# EAGLE board Arduino PMC (EAGLE 6.2)
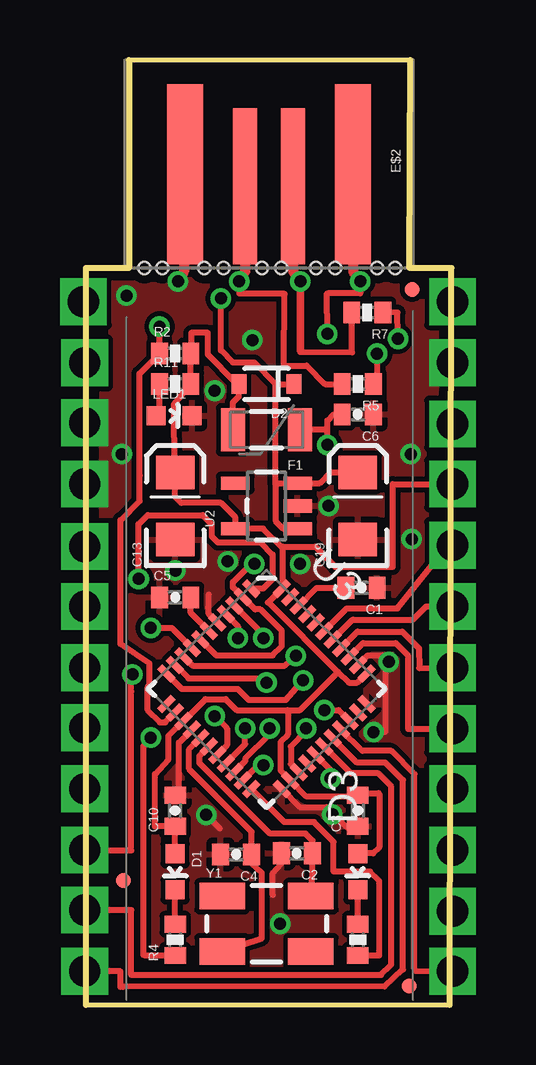
[diagram p0: board, top side]
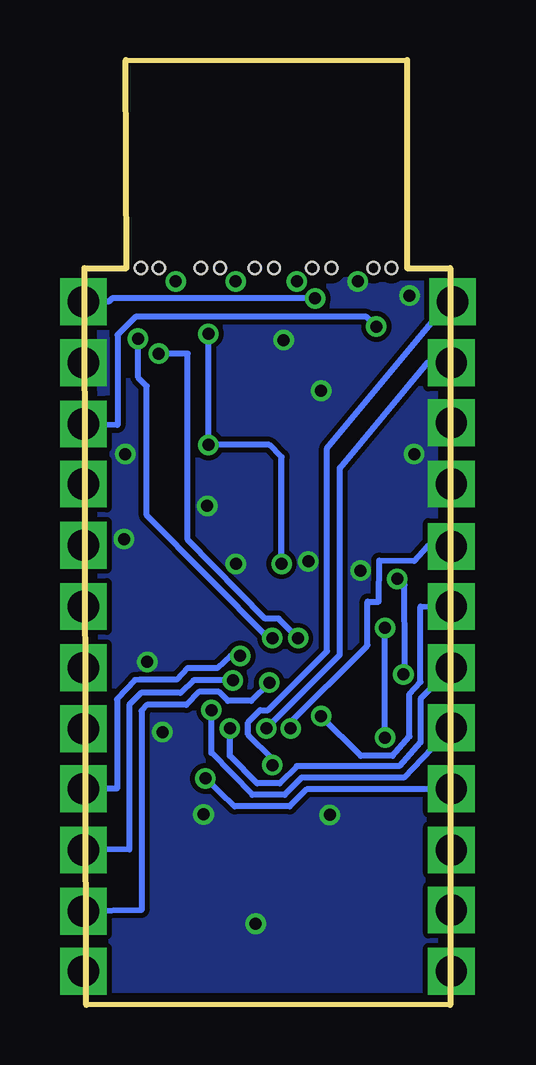
[diagram p1: board, bottom side, seen from below]

Size 15.25 x 39.37 mm. Coordinates in mm from the lower left corner, seen from the top.
Outline: 1.8,39.37 1.8,30.7 0,30.7 0,0 15.18,0 15.25,30.7 13.5,30.7 13.53,39.37 1.8,39.37
Copper layers (1*16): Top 0.0356mm / dielectric 1.5011mm / Bottom 0.0356mm
Design rules: minimum track width 6mil, minimum drill 13mil, track to track 6mil, track to pad 6mil, pad to pad 6mil, via to via 6mil, smd to smd 6mil, copper to edge 15mil, drill to drill 6mil, minimum pad ring 7mil, minimum via ring 7mil, stop-mask expansion 4mil, vias tented up to drill 0mil, thermal gap 10mil
Net classes: 0 default: width 0.203 mm
Holes 0.5 mm at 2.45,30.7 3.2,30.7 4.95,30.7 5.75,30.7 7.35,30.7 8.15,30.7 9.6,30.7 10.4,30.7 12.15,30.7 12.9,30.7

## Footprints (pad centres in the part's own frame; a part is rotated, then mirrored left to right if it is on the bottom)
0402-CAP = smd 0.7 x 0.9: 1 -0.65,0; 2 0.65,0
EIA3216 = smd 1.4 x 1.6: A 1.4,0; C -1.4,0
LED-0603 = smd 0.8 x 0.8: A 0,-0.75; C 0,0.75
SOD-323 = smd 0.63 x 0.83: 1 -1.15,0; 2 1.15,0
USB-A-PCB = smd 7.5 x 1.5: 5V -0.2,-3.5; GND -0.2,3.5 | smd 6.5 x 1: USB_M 0.3,-1; USB_P 0.3,1
PTC-1206 = smd 1 x 1.8: 1 -1.4,0; 2 1.4,0
MICRO-FIDUCIAL = smd 0.635 x 0.635: 1 0,0
0402-RES = smd 0.7 x 0.9: 1 -0.65,0; 2 0.65,0
SOT23-5 = smd 0.55 x 1.2: 1 -0.95,-1.3; 2 0,-1.3; 3 0.95,-1.3; 4 0.95,1.3; 5 -0.95,1.3
QFN-44-NOPAD = smd 0.8 x 0.3: 1 -3.4,2.5; 2 -3.4,2; 3 -3.4,1.5; 4 -3.4,1; 5 -3.4,0.5; 6 -3.4,0; 7 -3.4,-0.5; 8 -3.4,-1; 9 -3.4,-1.5; 10 -3.4,-2; 11 -3.4,-2.5; 23 3.4,-2.5; 24 3.4,-2; 25 3.4,-1.5; 26 3.4,-1; 27 3.4,-0.5; 28 3.4,0; 29 3.4,0.5; 30 3.4,1; 31 3.4,1.5; 32 3.4,2; 33 3.4,2.5 | smd 0.3 x 0.8: 12 -2.5,-3.4; 13 -2,-3.4; 14 -1.5,-3.4; 15 -1,-3.4; 16 -0.5,-3.4; 17 0,-3.4; 18 0.5,-3.4; 19 1,-3.4; 20 1.5,-3.4; 21 2,-3.4; 22 2.5,-3.4; 34 2.5,3.4; 35 2,3.4; 36 1.5,3.4; 37 1,3.4; 38 0.5,3.4; 39 0,3.4; 40 -0.5,3.4; 41 -1,3.4; 42 -1.5,3.4; 43 -2,3.4; 44 -2.5,3.4
CRYSTAL-SMD-5X3 = smd 1.9 x 1.1: 1 -1.85,-1.15; 2 1.85,-1.15; 3 1.85,1.15; 4 -1.85,1.15

## Placement (x,y rotation side)
C1  0.1uF  [0402-CAP]  11.5,17.38 180 top
C2  22pF  [0402-CAP]  8.81,6.32 180 top
C3  0.1uF  [0402-CAP]  11.35,8.09 90 top
C4  22pF  [0402-CAP]  6.27,6.27 180 top
C5  1uF  [0402-CAP]  3.73,16.98 0 top
C6  1uF  [0402-CAP]  11.35,24.6 180 top
C10  1uF  [0402-CAP]  3.73,8.09 90 top
C13  10uF  [EIA3216]  3.73,20.79 90 top
C19  10uF  [EIA3216]  11.35,20.79 90 top
D1  Yellow  [LED-0603]  3.73,5.55 180 top
D2  [SOD-323]  7.54,25.87 180 top
D3  Green  [LED-0603]  11.35,5.55 180 top
E$2  [USB-A-PCB]  7.65,34.4 270 top
F1  500mA  [PTC-1206]  7.54,23.96 180 top
JP1  FIDUCIALUFIDUCIAL  [MICRO-FIDUCIAL]  13.48,0.79 0 top
JP2  FIDUCIALUFIDUCIAL  [MICRO-FIDUCIAL]  13.62,29.81 0 top
JP3  FIDUCIALUFIDUCIAL  [MICRO-FIDUCIAL]  1.58,5.19 0 top
LED1  Red  [LED-0603]  3.68,24.55 270 top
R2  10K  [0402-RES]  3.73,27.14 0 top
R4  330  [0402-RES]  3.73,2.71 90 top
R5  22  [0402-RES]  11.35,25.87 180 top
R6  330  [0402-RES]  11.35,2.71 90 top
R7  22  [0402-RES]  11.74,28.85 180 top
R11  1K  [0402-RES]  3.73,25.87 0 top
U2  MIC5219  [SOT23-5]  7.54,20.79 90 top
U3  ATMEGA32U4  [QFN-44-NOPAD]  7.54,13.17 315 top
Y1  16MHz  [CRYSTAL-SMD-5X3]  7.54,3.38 0 top

## Library data of the parts
C1-C6 C10 C13 C19 D1-D3 F1 JP1-JP3 LED1 R2 R4-R7 R11 U2 U3 Y1 = SparkFun
E$2 = SparkFun-Connectors

## Nets
A0: U3.36
A1: U3.37
A2: U3.38
A3: U3.39
A4: U3.40
A5: U3.41
AREF: C1.2 U3.42
D2: U3.19
D3: U3.18
D4: U3.25
D5: U3.31
D6: U3.27
D7: U3.1
D8: U3.28
D9: U3.29
D10: U3.30
D11: U3.12
D12: U3.26
D13: U3.32
D17: R4.1 U3.8
D+: R5.1 U3.4
D-: R7.1 U3.3
GND [vcc]: C1.1 C2.2 C3.1 C4.2 C5.1 C6.1 C10.2 C13.C C19.C LED1.C U2.2 U3.5 U3.15 U3.23 U3.33 U3.35 U3.43
MISO: U3.11
MOSI: U3.10
N$1: C4.1 U3.16 Y1.1
N$2: C2.1 U3.17 Y1.3
N$4: C5.2 U3.6
N$5: D1.C R4.2
N$6: R7.2
N$7: D3.C R6.2
N$8: R5.2
N$38: LED1.A R11.1
RAW [vcc]: C19.A D2.1 U2.1 U2.3
RESET: R2.1 U3.13
RXI: U3.20
S$4: D2.2 F1.2
SCK: U3.9
TXLED: R6.1 U3.22
TXO: U3.21
UVCC: C6.2 F1.1 U3.2 U3.7
VCC: C3.2 C10.1 C13.A D1.A D3.A R2.2 R11.2 U2.5 U3.14 U3.24 U3.34 U3.44

## Tracks (layer width: path | path; a pad name or v marks a point on that pad's centre or on a via)
A0  (via drill 1.3 pad 1.93)
  Top 0.254: U3.36 11.57,15.07 12.93,15.07 13.44,14.57 13.44,11.5 v15.3,11.5
A1  (via drill 1.3 pad 1.93)
  Top 0.254: U3.37 11.34,15.56 13.2,15.56 13.9,14.85 13.91,14.03 v15.3,14.05
A2  (via drill 1.3 pad 1.93)
  Top 0.254: U3.38 11.11,16.04 11.15,16.05 13.65,16.05 14.2,16.6 v15.3,16.6
A3  (via drill 1.3 pad 1.93)
  Top 0.254: U3.39 10.89,16.52 13,16.52 15.1,19.15 v15.3,19.15
AREF
  Top 0.254: U3.42 9.63,17.38 C1.2
D2  (via drill 0.5, 1.3 pad 1.93)
  Top 0.254: U3.19 6.65,10.87 v6.65,11.52
  Bottom 0.254: v6.65,11.52 6.78,11.65 3.48,14.95 3.45,15 3.45,16.8 2.98,16.8 2.96,18.52 1.5,18.5 0.95,19.12 -0.01,19.12 v-0.05,19.1
D3  (via drill 0.5, 1.3 pad 1.93)
  Top 0.254: v5.38,12.03 5.89,11.52 5.89,10.81 U3.18
  Bottom 0.254: v5.38,12.03 3.73,10.38 2.41,10.38 1.7,11.19 1.7,12.95 1.24,13.46 1.24,16.59 v-0.05,16.6
D4  (via drill 0.5, 1.3 pad 1.93)
  Top 0.254: U3.25 8.56,10.03 8.56,10.76 9.19,11.39 v9.19,11.52
  Bottom 0.254: v9.19,11.52 9.19,10.38 8.05,9.23 7.11,9.23 6.4,9.94 2.13,9.94 1.24,10.93 1.24,12.75 v-0.05,14.05
D5  (via drill 0.5, 1.3 pad 1.93)
  Top 0.254: U3.31 10.55,12.28 v9.95,12.28
  Bottom 0.254: v9.95,12.28 9.95,10.5 8.25,8.75 6.91,8.75 6.19,9.46 1.94,9.46 v-0.05,11.55
D6  (via drill 0.5, 1.3 pad 1.93)
  Top 0.254: U3.27 10.21,9.8 v10.21,9.44
  Bottom 0.254: v10.21,9.44 8.99,8.27 6.7,8.27 5.99,8.98 0.61,8.98 v-0.05,9
D7  (via drill 0.5, 1.3 pad 1.93)
  Top 0.254: v1.95,13.77 1.9,13.77 1.9,13.05 1.9,6.43 0,6.43 v-0.05,6.45 | v2.21,17.75 2.21,20.03 2.59,20.41 4.87,20.41 5.25,20.03 5.25,19.52 5.51,19.27 7.29,19.27 7.79,18.76 7.79,17.74 7.39,17.34 U3.1
  Bottom 0.254: v2.21,17.75 1.9,17.49 1.9,14.4 1.9,13.77 v1.95,13.77
D8  (via drill 1.3 pad 1.93)
  Top 0.254: U3.28 11.07,9.64 12.21,9.64 12.75,9.11 12.75,1.68 12.32,1.25 1.9,1.25 1.9,3.95 v-0.05,3.95
D9  (via drill 1.3 pad 1.93)
  Top 0.254: U3.29 11.32,10.1 12.49,10.1 13.23,9.36 13.23,1.48 12.47,0.77 1.55,0.75 1.45,0.75 1.45,1.4 v-0.05,1.4
D10  (via drill 1.3 pad 1.93)
  Top 0.254: U3.30 11.54,10.58 12.74,10.58 13.71,9.61 13.71,1.48 13.77,1.42 v15.3,1.4
D17  (via drill 0.5)
  Top 0.254: U3.8 3.59,15.71 v2.71,15.71 | R4.1 2.48,2.06 2.41,2.08 2.41,10.78 v2.71,11.14
  Bottom 0.254: v2.71,11.14 v2.71,15.71
D+  (via drill 0.5)
  Top 0.254: v6.35,15.28 6.35,15.78 U3.4 | v12.15,27.14 12.15,27.12 12.15,25.87 R5.1
  Bottom 0.254: v6.35,15.28 7.16,16.09 7.72,16.09 10.95,19.37 10.95,27.14 v12.15,27.14
D-  (via drill 0.5)
  Top 0.254: v7.41,15.28 7.41,15.42 U3.3 | R7.1 13,28.84 13.02,27.91 v13.02,27.76
  Bottom 0.254: v7.41,15.28 7.54,15.23 12.66,20.39 12.66,25.78 13.01,26.14 13.01,27.69 13,27.71 v13.02,27.76
GND  (via drill 0.5, 0.5 pad 0.3, 0.5 pad 0.81, 1.3 pad 1.93)
  Top 0.254: U3.23 8.93,8.24 10.05,8.24 v10.29,7.94 11,7.29 C3.1 | U3.5 5.13,16.29 5.13,17.11 | U3.35 11.77,14.57 12.49,14.57 12.5,11.36 v12,11.36 | U3.15 3.88,10.93 3.88,8.74 C10.2 | v5.02,7.91 5.6,7.34 | C2.2 8.16,5.9 7.79,5.48 7.79,4.59
  Top 0.406: 4.1,31.25 4.1,30.55 3.8,30.2
  other vias: 8.11,3.38 3.74,18.1 13.6,19.41 10.13,20.79 8.94,18.38 5.92,18.48 12.63,14.29 5.38,25.59 -0.05,24.25 -0.05,21.7 15.3,26.75 6.95,27.7 13.55,22.95 3.85,30.15 1.5,22.95 1.7,29.55
  pour Top (isolate 0.203): 14.64,30.17 0.68,30.22 0.63,0.4 14.64,0.4
  pour Bottom (isolate 0.203): 14.66,30.22 0.66,30.22 0.41,0.45 15.01,0.55
MISO  (via drill 0.5, 1.3 pad 1.93)
  Top 0.254: U3.11 4,13.17 6.34,13.17 6.8,12.71 8.35,12.71 v9.06,13.52
  Bottom 0.254: v9.06,13.52 10.71,13.52 11.25,13 12.9,13 13.38,12.5 13.38,6.48 v15.3,6.45
MOSI  (via drill 0.5, 1.3 pad 1.93)
  Top 0.254: U3.10 4.28,13.6 7.36,13.6 v7.54,13.42
  Bottom 0.254: v7.54,13.42 8.3,12.66 9.27,12.66 9.65,13.04 10.48,13.04 11,12.5 12.65,12.5 12.87,12.25 12.87,3.95 v15.3,3.9
N$1
  Top 0.203: C4.1 6.92,6.93
  Top 0.254: Y1.1 7.35,2.78 7.35,5.5 6.92,5.91 C4.1 6.92,7.21 4.31,9.82 4.31,10.65 U3.16
N$2
  Top 0.254: Y1.3 9.46,5.5 C2.1 9.46,6.84 9.17,7.13 7.69,7.13 4.75,10.07 4.75,10.38 U3.17
N$4
  Top 0.254: C5.2 4.38,16.33 U3.6
N$5
  Top 0.254: R4.2 D1.C
N$6
  Top 0.254: 8.94,27.21 11.11,27.19 11.1,28.79 11.1,28.8 R7.2
N$7
  Top 0.254: R6.2 D3.C
N$8
  Top 0.254: 8.29,29.61 8.27,26.63 9.22,26.63 9.98,25.87 R5.2
N$38
  Top 0.203: LED1.A 3.08,24.7
  Top 0.254: 3.08,24.7 R11.1
RAW  (via drill 0.5, 1.3 pad 1.93)
  Top 0.203: 7.92,21.68 7.98,21.74
  Top 0.254: C19.A 10.21,22.19 9.76,21.74 U2.3 7.98,21.74 | U2.1 8.24,19.84 7.92,20.15 7.92,21.68 7.92,25.87 | v5.63,29.43 5.63,27.27 6.14,26.76 7.03,26.76 7.92,25.87 | 7.92,25.87 D2.1
  Bottom 0.254: v5.63,29.43 14.1,29.43 14.25,29.3 v15.3,29.3
RESET  (via drill 0.5, 1.3 pad 1.93)
  Top 0.254: R2.1 v3.08,28.26 | U3.13 3.31,11.77 3.1,11.77 2.59,12.28 2.59,13.24 2.66,13.37 2.66,14.22 1.44,15.04 1.45,15.04 1.45,20.2 2.25,21 2.25,22.05 2.24,26.3 R2.1 | R2.1
  Bottom 0.254: v3.08,28.26 3.49,28.67 13.12,28.67 13.87,27.92 13.87,24.16 15.24,24.18 v15.29,24.2 v15.3,24.2
RXI  (via drill 0.5, 1.3 pad 1.93)
  Top 0.203: 6.65,10.16 6.65,10.25
  Top 0.254: U3.20 6.65,10.16 | 6.65,10.25 7.67,11.26 v7.67,11.52
  Bottom 0.254: v7.67,11.52 4.6,14.59 4.6,22.36 0.94,26.77 v-0.05,26.75
S$1
  Top 0.406: 11.15,31.1 11.15,30.55 11.45,30.2
S$2  (via drill 0.5 pad 0.81)
  Top 0.305: 8.95,27.25 v8.95,30.15
  Top 0.406: 8.65,31.05 8.65,30.55 v8.95,30.15
S$3  (via drill 0.5 pad 0.81)
  Top 0.406: 6.65,31.15 6.65,30.55 v6.4,30.15
S$4
  Top 0.254: 5.11,27.08 5.13,27.06 6.22,25.97 D2.2 6.39,25.36 6.14,25.11 F1.2
S$5
  Top 0.254: 5.1,27.1 5.1,28 4.4,28 4.4,27.6
S$6
  Top 0.254: 11.45,30.1 11.45,29.65 10.1,29.65
S$7
  Top 0.254: 6.4,30.05 6.4,29.65 8.25,29.65
S$8  (via drill 0.5 pad 0.81)
  other vias: 11.45,30.15
SCK  (via drill 0.5, 1.3 pad 1.93)
  Top 0.254: v8.76,14.54 8.31,14.14 4.45,14.14 U3.9
  Bottom 0.254: v8.76,14.54 9.16,14.54 9.72,14.03 10.95,14.03 11.4,13.55 12.95,13.55 13.15,13.53 13.89,12.73 13.89,9.01 v15.3,9
TXLED
  Top 0.203: R6.1 11.39,2.06
  Top 0.254: U3.22 8.29,7.61 9.52,7.61 10.34,6.79 10.34,5.55 10.89,5.55 11.86,5.55 12.24,5.17 12.24,2.06 11.39,2.06
TXO  (via drill 0.5, 1.3 pad 1.93)
  Top 0.254: U3.21 7.19,9.99 v7.41,9.99
  Bottom 0.254: v7.41,9.99 7.41,10.25 8.43,11.26 8.43,11.77 7.92,12.28 7.59,12.28 5.13,14.74 5.13,23.2 0.05,29.3 v-0.1,29.3
UVCC  (via drill 0.5)
  Top 0.254: U3.7 5.44,14.57 7.79,14.57 8.18,14.95 8.18,15.58 7.28,16.48 7.06,16.48 U3.2 6.14,17.39 6.14,17.61 6.91,18.38 v7.03,18.38 | v10.08,27.96 10.07,29.65 | v10.08,23.33 10.08,23.96 | 10.08,23.96 10.08,24.35 10.33,24.6 C6.2 | 10.08,23.96 F1.1
  Bottom 0.254: v10.08,27.96 v10.08,23.33 7.54,23.33 7.03,22.82 v7.03,18.38
VCC  (via drill 1.3 pad 1.93)
  Top 0.203: 7.64,16.75 7.59,16.76 | 8.22,19.09 8.2,19.04 | U3.44 8.22,17.34 | 11.34,8.72 C3.2 | 11.36,6.31 D3.A | C10.1 3.69,7.44
  Top 0.254: U3.34 11.33,13.42 10.97,13.42 10.52,13.87 | 8.43,12.28 6.29,12.28 5.83,12.74 4.99,12.74 U3.14 3.45,11.2 3.45,10.23 2.89,9.61 2.89,7.44 3.69,7.44 | 8.43,12.28 8.43,11.26 8.12,10.96 8.12,9.76 U3.24 9.18,8.7 11.37,8.7 11.34,8.82 | 10.52,13.87 7.64,16.75 | 7.59,16.76 U3.44 | 8.43,12.28 8.94,12.28 10.52,13.87 | 8.2,19.04 7.4,19.84 U2.5 6.24,20.31 5.63,20.92 3.98,20.92 3.73,21.17 C13.A 3.9,22.24 3.7,22.25 3.68,25.02 R11.2 R2.2 4.38,27.17 4.4,27.2 | 8.22,17.34 8.22,19.09 9.57,19.09 10.41,18.25 12.8,18.25 12.8,21.7 v15.3,21.7 | D1.A C10.1 | 11.34,8.82 12.21,8.82 12.24,8.79 12.24,6.57 11.99,6.31 11.36,6.31 | 11.34,8.82 11.34,8.72